# EAGLE board DP_AADK (EAGLE 5.07)
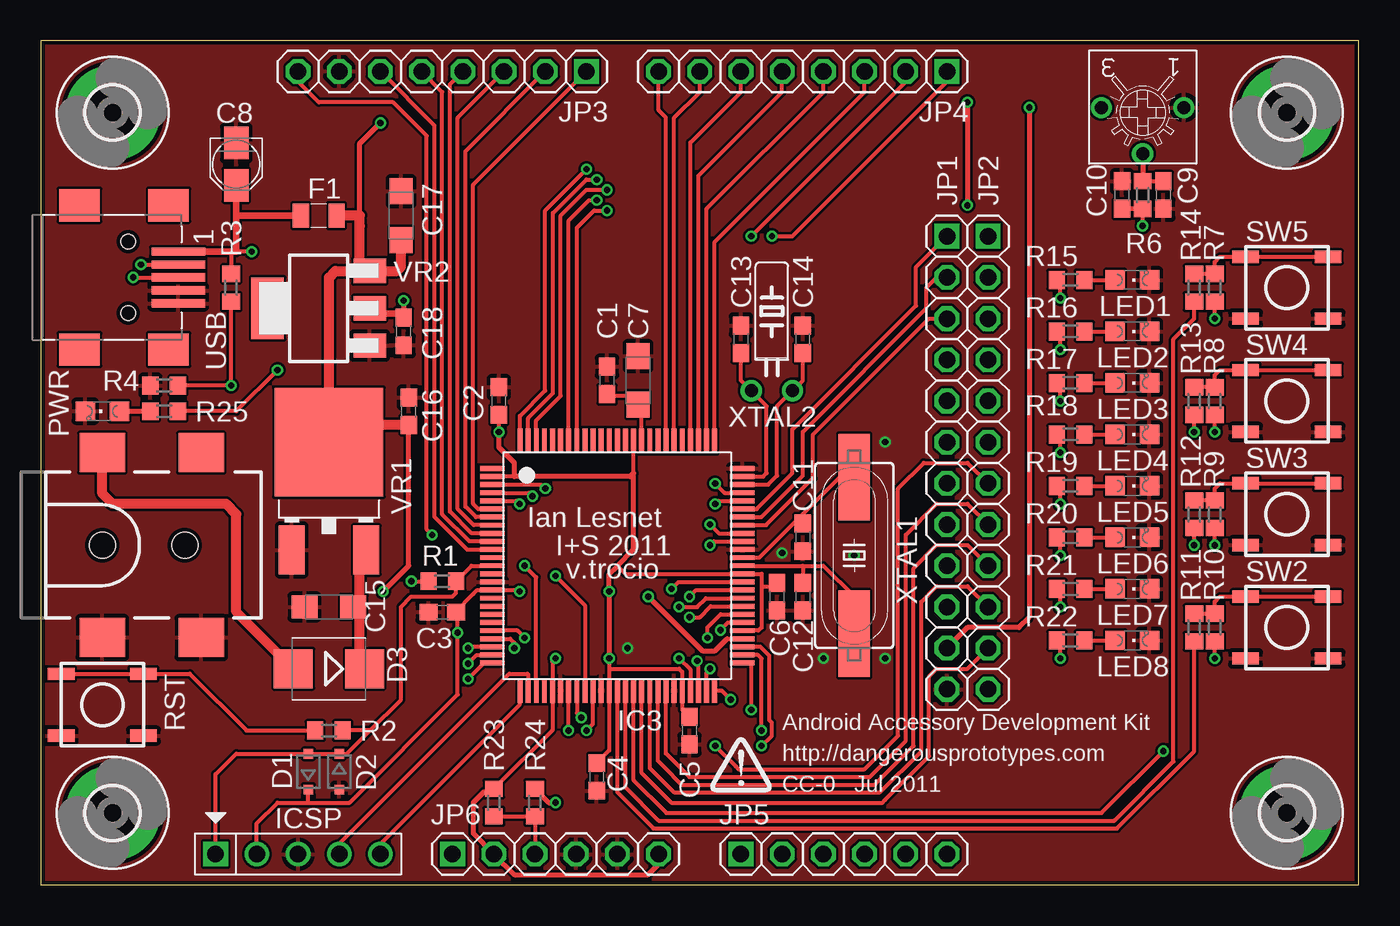
[diagram p0: board, top side]
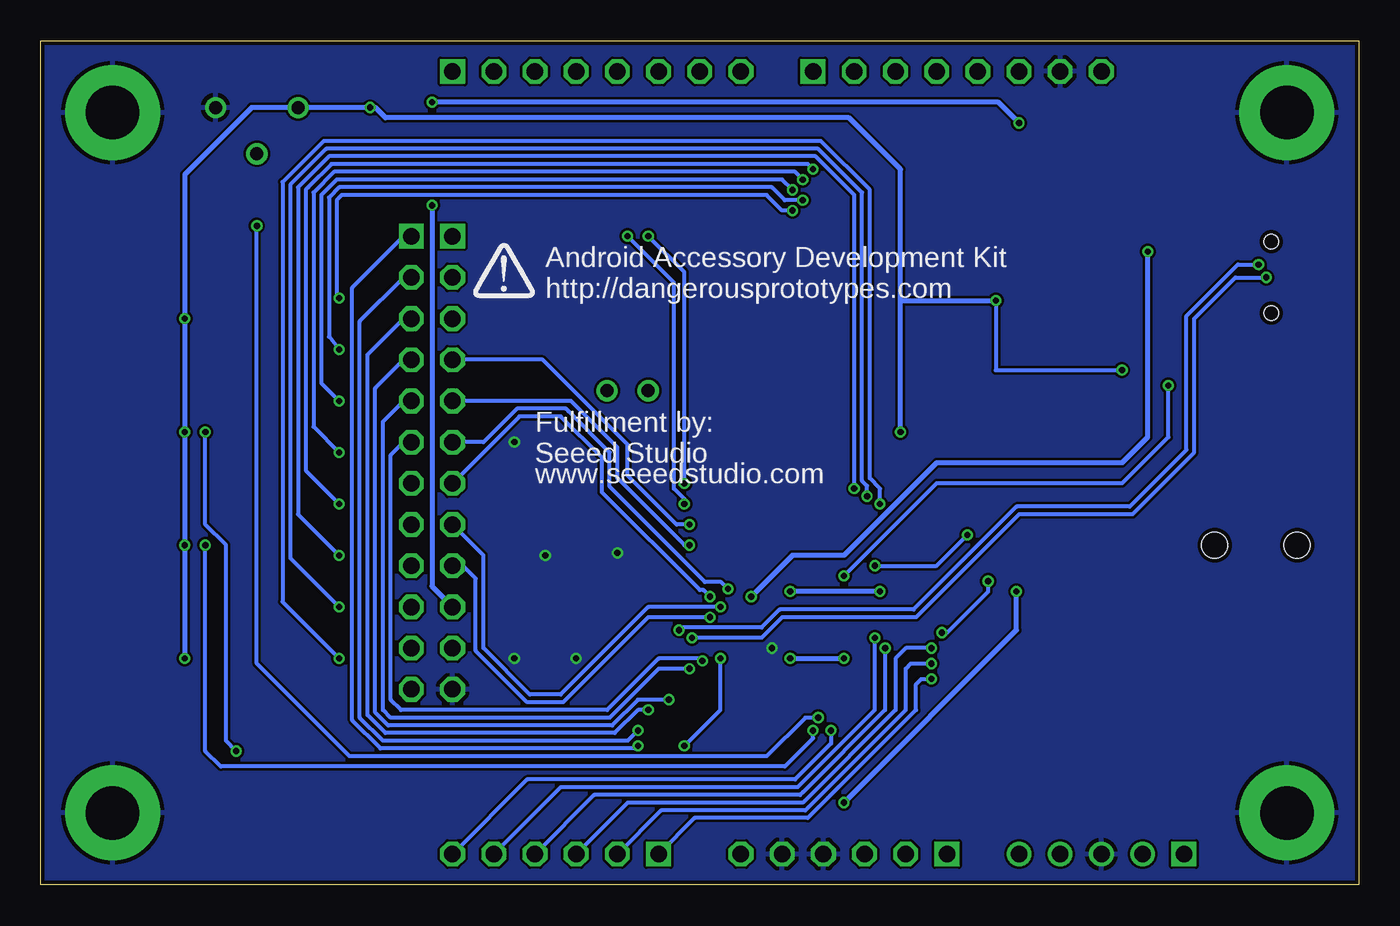
[diagram p1: board, bottom side, seen from below]

Size 81.28 x 52.07 mm. Coordinates in mm from the lower left corner, seen from the top.
Outline: 0,0 81.28,0 81.28,52.07 0,52.06 0,0
Copper layers (1*16): Top 0.035mm / dielectric 1.5mm / Bottom 0.035mm
Design rules "Fusion_eagle_rule_v1.1": minimum track width 6mil, minimum drill 12mil, track to track 6mil, track to pad 6mil, pad to pad 6mil, via to via 6mil, smd to smd 0mil, copper to edge 10mil, drill to drill 10mil, minimum pad ring 10mil, minimum via ring 6mil, stop-mask expansion 2mil, vias tented up to drill 100mil, thermal gap 10mil

## Footprints (pad centres in the part's own frame; a part is rotated, then mirrored left to right if it is on the bottom)
C603 = smd 1.1 x 1: 1 -0.85,0; 2 0.85,0
SMC_A = smd 1.6 x 1.4: + -1.5,0; - 1.5,0
CASE_A = smd 2 x 1.5: + 1.3,0; - -1.3,0
DO323 = smd 0.6 x 0.6: A 1.1,0; C -1.1,0
SMB = smd 2.4 x 2.4: A 2.2,0; C -2.2,0
0805_PTC = smd 1 x 1.5: 1 -1.1,0; 2 1.1,0
3,3-PAD = drill 3.3 pad 5.842 round: B3,3 0,0
TQFP100 = smd 0.3 x 1.5: P1 -6,-7.7; P2 -5.5,-7.7; P3 -5,-7.7; P4 -4.5,-7.7; P5 -4,-7.7; P6 -3.5,-7.7; P7 -3,-7.7; P8 -2.5,-7.7; P9 -2,-7.7; P10 -1.5,-7.7; P11 -1,-7.7; P12 -0.5,-7.7; P13 0,-7.7; P14 0.5,-7.7; P15 1,-7.7; P16 1.5,-7.7; P17 2,-7.7; P18 2.5,-7.7; P19 3,-7.7; P20 3.5,-7.7; P21 4,-7.7; P22 4.5,-7.7; P23 5,-7.7; P24 5.5,-7.7; P25 6,-7.7; P51 6,7.7; P52 5.5,7.7; P53 5,7.7; P54 4.5,7.7; P55 4,7.7; P56 3.5,7.7; P57 3,7.7; P58 2.5,7.7; P59 2,7.7; P60 1.5,7.7; P61 1,7.7; P62 0.5,7.7; P63 0,7.7; P64 -0.5,7.7; P65 -1,7.7; P66 -1.5,7.7; P67 -2,7.7; P68 -2.5,7.7; P69 -3,7.7; P70 -3.5,7.7; P71 -4,7.7; P72 -4.5,7.7; P73 -5,7.7; P74 -5.5,7.7; P75 -6,7.7 | smd 1.5 x 0.3: P26 7.7,-6; P27 7.7,-5.5; P28 7.7,-5; P29 7.7,-4.5; P30 7.7,-4; P31 7.7,-3.5; P32 7.7,-3; P33 7.7,-2.5; P34 7.7,-2; P35 7.7,-1.5; P36 7.7,-1; P37 7.7,-0.5; P38 7.7,0; P39 7.7,0.5; P40 7.7,1; P41 7.7,1.5; P42 7.7,2; P43 7.7,2.5; P44 7.7,3; P45 7.7,3.5; P46 7.7,4; P47 7.7,4.5; P48 7.7,5; P49 7.7,5.5; P50 7.7,6; P76 -7.7,6; P77 -7.7,5.5; P78 -7.7,5; P79 -7.7,4.5; P80 -7.7,4; P81 -7.7,3.5; P82 -7.7,3; P83 -7.7,2.5; P84 -7.7,2; P85 -7.7,1.5; P86 -7.7,1; P87 -7.7,0.5; P88 -7.7,0; P89 -7.7,-0.5; P90 -7.7,-1; P91 -7.7,-1.5; P92 -7.7,-2; P93 -7.7,-2.5; P94 -7.7,-3; P95 -7.7,-3.5; P96 -7.7,-4; P97 -7.7,-4.5; P98 -7.7,-5; P99 -7.7,-5.5; P100 -7.7,-6
HEADER_PRG_1X05_ICSP_B = drill 1.016 square: 1 -5.08,0 | drill 1.016 round: 2 -2.54,0; 3 0,0; 4 2.54,0; 5 5.08,0
1X12-S = drill 1.016 square: 1 -13.97,0 | drill 1.016 octagon: 2 -11.43,0; 3 -8.89,0; 4 -6.35,0; 5 -3.81,0; 6 -1.27,0; 7 1.27,0; 8 3.81,0; 9 6.35,0; 10 8.89,0; 11 11.43,0; 12 13.97,0
1X08-S = drill 1.016 square: 1 -8.89,0 | drill 1.016 octagon: 2 -6.35,0; 3 -3.81,0; 4 -1.27,0; 5 1.27,0; 6 3.81,0; 7 6.35,0; 8 8.89,0
1X06-S = drill 1.016 square: 1 -6.35,0 | drill 1.016 octagon: 2 -3.81,0; 3 -1.27,0; 4 1.27,0; 5 3.81,0; 6 6.35,0
LED-805 = smd 1.2 x 1.2: A 0,-1.05; C 0,1.05
R603 = smd 1 x 1.1: 1 -0.85,0; 2 0.85,0
TRIMMER_3362P = drill 0.8 round: 1 -2.54,-0.31; 2 0,2.54; 3 2.54,-0.31
TACT_SWITCH_SMALL = smd 1.651 x 0.762: 1 -2.54,1.905; 2 2.54,1.905; 3 -2.54,-1.905; 4 2.54,-1.905
POWER_JACK_SMD = smd 2.8 x 2.4: GND 0,-5.7; P$4 6.1,-5.7; VIN0 0,5.7; VIN1 6.1,5.7 | hole 1.6: 0,0; 5.08,0
CONN_USB_MINI-B = smd 2 x 2.5: BODY@1 -4.45,2.5; BODY@2 4.45,2.5; BODY@3 4.45,-3; BODY@4 -4.45,-3 | smd 0.5 x 3.3: D+ 0,3.1; D- -0.8,3.1; GND 1.6,3.1; ID 0.8,3.1; VUSB -1.6,3.1 | hole 0.9: -2.2,0; 2.2,0
DPAK = smd 1.6 x 3: 1 -2.3,-6.65; 3 2.3,-6.65 | smd 6.7 x 6.7: 2 0,0
SOT223 = smd 1.5 x 2: 1 -2.3,-3.15; 2 0,-3.15; 3 2.3,-3.15 | smd 3.8 x 2: 4 0,3.15
HC-49U = smd 5.334 x 1.93: 1 -4.826,0; 2 4.826,0
TC-26 = drill 0.8 round: P1 -1.27,-2.54; P2 1.27,-2.54

## Placement (x,y rotation side)
C1  0.1uF  [C603]  34.92,31.11 90 top
C2  0.1uF  [C603]  28.26,29.84 90 top
C3  0.1uF  [C603]  24.77,16.83 180 top
C4  0.1uF  [C603]  34.29,6.67 270 top
C5  0.1uF  [C603]  40.01,9.53 270 top
C6  0.1uF  [C603]  45.4,17.78 270 top
C7  10uF  [SMC_A]  36.83,31.11 90 top
C8  220uF  [CASE_A]  12.06,44.45 270 top
C9  1uF  [C603]  69.22,42.55 270 top
C10  0.01uF  [C603]  66.67,42.55 90 top
C11  33pF  [C603]  46.99,21.43 270 top
C12  33pF  [C603]  46.99,17.78 270 top
C13  12pF  [C603]  43.18,33.66 90 top
C14  12pF  [C603]  46.99,33.66 90 top
C15  10uF  [SMC_A]  17.78,17.14 180 top
C16  0.1uF  [C603]  22.7,29.21 90 top
C17  10uF  [SMC_A]  22.23,41.27 90 top
C18  0.1uF  [C603]  22.38,34.13 270 top
D1  [DO323]  16.51,6.99 90 top
D2  [DO323]  18.41,6.99 270 top
D3  ES2D  [SMB]  17.78,13.34 180 top
F1  0.75A  [0805_PTC]  17.14,41.27 0 top
H1  MOUNT-PAD-ROUND3.3  [3,3-PAD]  76.83,4.45 0 top
H2  MOUNT-PAD-ROUND3.3  [3,3-PAD]  4.45,47.62 0 top
H3  MOUNT-PAD-ROUND3.3  [3,3-PAD]  4.45,4.45 0 top
H4  MOUNT-PAD-ROUND3.3  [3,3-PAD]  76.83,47.62 0 top
IC3  [TQFP100]  35.56,19.68 270 top
ICSP  HEADER_PRG_PIC_ICSPB  [HEADER_PRG_1X05_ICSP_B]  15.88,1.91 0 top
JP1  [1X12-S]  55.88,26.04 270 top
JP2  [1X12-S]  58.42,26.04 270 top
JP3  [1X08-S]  24.77,50.16 180 top
JP4  [1X08-S]  46.99,50.16 180 top
JP5  [1X06-S]  49.53,1.91 0 top
JP6  [1X06-S]  31.75,1.91 0 top
LED1  [LED-805]  67.31,37.31 270 top
LED2  [LED-805]  67.31,34.13 270 top
LED3  [LED-805]  67.31,30.96 270 top
LED4  [LED-805]  67.31,27.78 270 top
LED5  [LED-805]  67.31,24.61 270 top
LED6  [LED-805]  67.31,21.43 270 top
LED7  [LED-805]  67.31,18.26 270 top
LED8  [LED-805]  67.31,15.08 270 top
PWR  [LED-805]  3.81,29.21 90 top
R1  10K  [R603]  24.77,18.73 180 top
R2  200R  [R603]  17.78,9.53 0 top
R3  10K  [R603]  11.75,36.83 90 top
R4  10K  [R603]  7.62,30.8 0 top
R5  10k  [TRIMMER_3362P]  67.94,47.62 180 top
R6  470R  [R603]  67.94,42.55 270 top
R7  10K  [R603]  72.39,36.83 270 top
R8  10K  [R603]  72.39,29.84 270 top
R9  10K  [R603]  72.39,22.86 270 top
R10  10K  [R603]  72.39,15.88 270 top
R11  470R  [R603]  71.12,15.88 90 top
R12  470R  [R603]  71.12,22.86 90 top
R13  470R  [R603]  71.12,29.84 90 top
R14  470R  [R603]  71.12,36.83 90 top
R15  470R  [R603]  63.5,37.31 0 top
R16  470R  [R603]  63.5,34.13 0 top
R17  470R  [R603]  63.5,30.96 0 top
R18  470R  [R603]  63.5,27.78 0 top
R19  470R  [R603]  63.5,24.61 0 top
R20  470R  [R603]  63.5,21.43 0 top
R21  470R  [R603]  63.5,18.26 0 top
R22  470R  [R603]  63.5,15.08 0 top
R23  0R  [R603]  27.94,5.08 270 top
R24  No Load  [R603]  30.48,5.08 270 top
R25  470R  [R603]  7.62,29.21 0 top
RST  [TACT_SWITCH_SMALL]  3.81,11.11 180 top
SW2  [TACT_SWITCH_SMALL]  76.83,15.88 0 top
SW3  [TACT_SWITCH_SMALL]  76.83,22.86 0 top
SW4  [TACT_SWITCH_SMALL]  76.83,29.84 0 top
SW5  [TACT_SWITCH_SMALL]  76.83,36.83 0 top
U$1  [DP-LOGO_TOP]  41.27,5.71 0 top
U$2  POWER_JACKSMD  [POWER_JACK_SMD]  3.81,20.95 0 top
U$3  DINA4_L  [DP_LOGO]  1.91,-6.35 0 top  (outside the outline)
U$4  [DP-LOGO-BOTTOM]  50.8,36.2 0 top
U$5  DINA4_L  [DP_LOGO]  1.91,-6.35 0 top  (outside the outline)
USB  CON-USB-MINI-BUSB1  [CONN_USB_MINI-B]  5.4,37.47 270 top
VR1  LD1117-5.0  [DPAK]  17.78,27.3 0 top
VR2  [SOT223]  17.14,35.56 90 top
XTAL1  8MHz  [HC-49U]  50.16,20.32 270 top
XTAL2  32.768Khz  [TC-26]  45.09,33.02 0 top

## Library data of the parts
C1-C18 D1 D2 F1 IC3 ICSP LED1-LED8 PWR R1-R25 RST SW2-SW5 U$3 USB VR1 VR2 XTAL1 XTAL2 = dp_devices
D3 = diode
H1-H4 = holes
JP1-JP6 = pinhead-2
U$1 U$4 = DP-logo
U$2 = SparkFun-3-2-07
U$5 = dp_devices; FF1: fulfillment by; FF2: Seeed Studio; FF3: www.seeedstudio.com; LICENSE: CC-0; PROJECT: Andriod Accessory Development kit; URL1: http://dangerousprototypes.com; URL2: DangerousPrototypes.com

## Nets
!MCLR: D1.A D2.C IC3.P13 ICSP.1 R1.1 R2.2
!MLCR: JP6.1
+3V3: C2.1 C3.1 C4.1 C5.1 C6.1 C18.1 D1.C IC3.P2 IC3.P16 IC3.P30 IC3.P37 IC3.P46 IC3.P55 IC3.P62 IC3.P86 ICSP.2 JP1.11 JP6.2 JP6.6 R1.2 R5.3 R7.2 R8.2 R9.2 R10.2 R23.1 R25.2 VR2.2
+5V: C16.1 C17.+ F1.2 JP1.10 R24.1 VR1.2 VR2.3
AN0: IC3.P25 JP5.1
AN1: IC3.P24 JP5.2
AN2: IC3.P23 JP5.3
AN3: IC3.P22 JP5.4
AN4: IC3.P21 JP5.5
AN8: IC3.P32 JP5.6
AREF: IC3.P28 JP3.8
BTN_1: IC3.P38 R11.1
BTN_2: IC3.P35 R12.1
BTN_3: IC3.P40 R13.1
BTN_4: IC3.P39 R14.1
CLK_1: C13.1 IC3.P74 XTAL2.P1
CLK_2: C14.1 IC3.P73 XTAL2.P2
D2: IC3.P76 JP4.3
D3: IC3.P77 JP4.4
D4: IC3.P78 JP4.5
D5: IC3.P79 JP4.6
D6: IC3.P81 JP4.7
D7: IC3.P82 JP4.8
D8: IC3.P6 JP3.1
D9: IC3.P7 JP3.2
D10: IC3.P8 JP3.3
D11: IC3.P9 JP3.4
D12: IC3.P10 JP3.5
D13: IC3.P11 JP3.6
GND: C1.2 C2.2 C3.2 C4.2 C5.2 C6.2 C7.- C8.- C9.2 C10.2 C11.2 C12.2 C13.2 C14.2 C15.- C16.2 C17.- C18.2 D2.A H1.B3,3 H2.B3,3 H3.B3,3 H4.B3,3 IC3.P15 IC3.P31 IC3.P36 IC3.P45 IC3.P65 IC3.P75 ICSP.3 JP1.12 JP3.7 JP6.4 JP6.5 LED1.C LED2.C LED3.C LED4.C LED5.C LED6.C LED7.C LED8.C PWR.C R4.1 R5.1 RST.1 RST.2 SW2.3 SW2.4 SW3.3 SW3.4 SW4.3 SW4.4 SW5.3 SW5.4 U$2.GND U$2.P$4 USB.GND USB.ID VR1.1 VR2.1
LED_1: IC3.P93 R15.1
LED_2: IC3.P94 R16.1
LED_3: IC3.P98 R17.1
LED_4: IC3.P99 R18.1
LED_5: IC3.P100 R19.1
LED_6: IC3.P3 R20.1
LED_7: IC3.P4 R21.1
LED_8: IC3.P5 R22.1
N$1: R2.1 RST.3 RST.4
N$2: C9.1 R5.2 R6.1
N$3: R10.1 R11.2 SW2.1 SW2.2
N$4: R9.1 R12.2 SW3.1 SW3.2
N$5: R8.1 R13.2 SW4.1 SW4.2
N$6: R7.1 R14.2 SW5.1 SW5.2
N$7: PWR.A R25.1
N$8: LED1.A R15.2
N$9: LED2.A R16.2
N$10: LED3.A R17.2
N$11: LED4.A R18.2
N$12: LED5.A R19.2
N$13: LED6.A R20.2
N$14: LED7.A R21.2
N$15: LED8.A R22.2
N$16: JP6.3 R23.2 R24.2
N$17: D3.A U$2.VIN0
N$18: C15.+ D3.C VR1.3
OSC_1: C11.1 IC3.P64 XTAL1.1
OSC_2: C12.1 IC3.P63 XTAL1.2
OVER_CURRENT: IC3.P34 R3.1 R4.2
PGC: IC3.P26 ICSP.5
PGD: IC3.P27 ICSP.4
RA2: IC3.P58 JP1.9
RA3: IC3.P59 JP1.8
RA4: IC3.P60 JP1.7
RA5: IC3.P61 JP1.6
RA14: IC3.P66 JP1.5
RA15: IC3.P67 JP1.4
RB12: IC3.P41 JP2.11
RB13: IC3.P42 JP2.10
RB14: IC3.P43 JP2.9
RB15: IC3.P44 JP2.8
RD8: IC3.P68 JP1.3
RD9: IC3.P69 JP1.2
RD10: IC3.P70 JP1.1
RD14: IC3.P47 JP2.7
RD15: IC3.P48 JP2.6
RF2: IC3.P52 JP2.2
RF3: IC3.P51 JP2.3
RF4: IC3.P49 JP2.5
RF5: IC3.P50 JP2.4
RF8: IC3.P53 JP2.1
RXD: IC3.P71 JP4.1
TRIM: C10.1 IC3.P33 R6.2
TXD: IC3.P72 JP4.2
USB_D+: IC3.P57 USB.D+
USB_D-: IC3.P56 USB.D-
VBUS_OUT: C8.+ F1.1 IC3.P54 R3.2 USB.VUSB
VDDCORE: C1.1 C7.+ IC3.P85

## Tracks (layer width: path | path; a pad name or v marks a point on that pad's centre or on a via)
!MCLR
  Top 0.254: IC3.P13 26.57,19.68 R1.1 25.61,18 25.4,17.78 22.86,17.78 22.23,17.14 22.23,11.43 20.32,9.53 | ICSP.1 10.79,6.83 12.06,8.1 16.5,8.1 D1.A D2.C 18.88,8.09 20.32,9.53 | 20.32,9.53 R2.2
+3V3  (via drill 0.38)
  Top 0.254: C18.1 22.49,35.08 22.38,35.08 v22.38,36.04 | ICSP.2 13.34,3.81 14.61,5.08 16.51,5.08 | 36.56,25.4 IC3.P86 | v35.06,13.97 35.06,13.34 | 35.06,13.34 IC3.P37 35.06,8.29 C4.1 | 35.56,19.68 36.06,19.18 IC3.P62 44.45,19.18 44.45,18.41 | v72.39,13.97 R10.2 | v72.39,20.95 R9.2 | v72.39,27.94 R8.2 | v72.39,34.92 R7.2 | IC3.P55 44.26,15.69 44.45,15.88 44.45,18.41 | C6.1 45.3,18.63 45.09,18.41 44.45,18.41 | 29.21,25.18 IC3.P2 | v28.26,27.94 C2.1 | C5.1 39.56,10.82 IC3.P46 39.56,13.14 39.37,13.34 35.06,13.34 | 26.67,17.94 26.92,18.18 IC3.P16 29.44,18.18 v29.53,18.1 | 26.67,17.94 | 26.67,17.94 25.61,16.88 C3.1 25.72,16.73 v25.72,15.56 25.72,11.75 19.05,5.08 16.51,5.08 | v22.86,18.73 R1.2 | R25.2 12.06,29.21 v14.61,31.75 | v31.75,13.97 31.56,13.78 IC3.P30 31.56,9.55 R23.1 | 16.51,5.08 D1.C
  Top 0.305: v35.06,13.97 v35.06,18.1 35.06,19.18 35.56,19.68 36.56,20.68 36.56,25.4 36.34,25.18 29.21,25.18 29.21,26.04 28.26,26.99 v28.26,27.94 | R23.1 27.94,5.71 27.3,5.71 26.67,5.08 26.67,3.17 JP6.2 29.21,0.64 37.47,0.64 38.1,1.27 JP6.6 | v22.38,36.04 C18.1 | JP1.11 57.15,15.88 60.33,15.88 60.96,16.51 v60.96,47.94
  Top 0.406: VR2.2 20.3,35.27 20.32,35.24 22.38,35.24 22.38,35.08 22.28,35.08 C18.1
  Bottom 0.254: v22.86,18.73 22.86,18.1 25.4,15.56 v25.72,15.56 | v14.61,31.75 22.38,31.75 v22.38,36.04
  Bottom 0.305: v72.39,13.97 v72.39,20.95 v72.39,27.94 v72.39,34.92 72.39,43.81 68.27,47.94 R5.3 60.63,47.94 | v35.06,13.97 v31.75,13.97 | v29.53,18.1 v35.06,18.1 | 28.26,36.04 v22.38,36.04 | v28.26,27.94 28.26,36.04 | 28.26,36.04 28.26,44.13 31.43,47.31 60.01,47.31 60.63,47.94 | 60.63,47.94 v60.96,47.94
+5V  (via drill 0.38)
  Top 0.305: v20.95,46.99 19.68,45.72 19.68,40.64 | v57.15,48.26 v57.15,41.91 | C16.1 22.7,19.68 v21.11,18.1 | v31.75,5.08 31.33,5.08 R24.1
  Top 0.61: C16.1 17.57,28.36 17.46,28.26 17.46,27.94 17.36,27.73 VR1.2 17.78,37.47 18.18,37.86 VR2.3 | VR2.3 19.93,37.86 19.68,38.1 19.68,40.64 19.68,41.27 F1.2 | VR2.3 21.98,37.86 22.23,38.1 C17.+
  Bottom 0.305: JP1.10 57.15,18.41 v57.15,41.91 | v20.95,46.99 22.23,48.26 v57.15,48.26 | v21.11,18.1 21.11,15.72 v31.75,5.08
AN0  (via drill 0.38)
  Top 0.254: IC3.P25 27.34,13.69 v26.35,12.7
  Bottom 0.254: v26.35,12.7 26.99,12.7 27.3,12.38 27.3,10.79 33.97,4.13 40.96,4.13 JP5.1
AN1  (via drill 0.38)
  Top 0.254: IC3.P24 26.89,14.19 v26.35,13.65
  Bottom 0.254: v26.35,13.65 27.62,13.65 27.94,13.34 27.94,10.79 33.66,5.08 | 33.66,5.08 | 33.66,5.08 34.13,4.6 43.02,4.6 JP5.2
AN2  (via drill 0.38)
  Top 0.254: IC3.P23 26.43,14.69 v26.35,14.61
  Bottom 0.254: v26.35,14.61 27.94,14.61 28.57,13.97 28.57,10.79 34.29,5.08 45.09,5.08 JP5.3
AN3  (via drill 0.38)
  Top 0.254: IC3.P22 28.95,15.19 29.21,14.92 v29.21,14.61
  Bottom 0.254: v29.21,14.61 29.21,10.79 34.29,5.71 | 34.29,5.71 | 34.29,5.71 34.45,5.56 47.15,5.56 JP5.4
AN4  (via drill 0.38)
  Top 0.254: IC3.P21 29.4,15.69 v29.84,15.24
  Bottom 0.254: v29.84,15.24 29.84,10.79 34.61,6.03 49.21,6.03 JP5.5
AN8  (via drill 0.38)
  Top 0.254: IC3.P32 32.56,9.54 v32.54,9.53
  Bottom 0.254: JP5.6 51.28,6.51 34.77,6.51 32.54,8.73 v32.54,9.53
AREF  (via drill 0.38)
  Top 0.254: JP3.8 15.88,49.53 17.14,48.26 21.75,48.26 23.81,46.2 23.81,21.91 v24.13,21.59 | IC3.P28 30.56,18.97 v29.84,19.68
  Bottom 0.254: v29.84,19.68 26.04,19.68 v24.13,21.59
BTN_1
  Top 0.254: R11.1 71.12,8.26 66.36,3.49 37.78,3.49 35.56,5.71 IC3.P38
BTN_2  (via drill 0.38)
  Top 0.254: v71.12,20.95 R12.1 | IC3.P35 34.06,9.93 v33.66,9.53
  Bottom 0.254: v33.66,9.53 33.66,9.05 35.4,7.3 70.17,7.3 71.12,8.26 v71.12,20.95
BTN_3  (via drill 0.38)
  Top 0.254: v71.12,27.94 R13.1 | v69.22,8.26 65.41,4.45 38.58,4.45 36.56,6.46 IC3.P40
  Bottom 0.254: v71.12,27.94 71.12,22.23 69.85,20.95 69.85,8.89 v69.22,8.26
BTN_4
  Top 0.254: R14.1 71.12,34.92 69.85,33.66 69.85,7.62 66.2,3.97 38.1,3.97 36.06,6.01 IC3.P39
CLK_1
  Top 0.254: IC3.P74 44.55,25.18 44.77,25.4 44.77,29.53 XTAL2.P1 43.18,31.11 C13.1
CLK_2
  Top 0.254: IC3.P73 44.85,24.68 45.4,25.24 45.4,29.53 XTAL2.P2 46.99,31.11 C14.1
D2
  Top 0.254: IC3.P76 41.56,39.66 50.8,48.9 JP4.3
D3
  Top 0.254: IC3.P77 41.06,41.7 48.26,48.9 JP4.4
D4
  Top 0.254: IC3.P78 40.56,43.73 45.72,48.9 JP4.5
D5
  Top 0.254: IC3.P79 40.06,45.77 43.18,48.9 JP4.6
D6
  Top 0.254: IC3.P81 39.06,47.31 40.64,48.9 JP4.7
D7
  Top 0.254: IC3.P82 38.56,47.32 38.1,47.78 JP4.8
D8
  Top 0.254: IC3.P6 26.98,23.18 26.67,23.5 26.67,43.18 JP3.1
D9
  Top 0.254: IC3.P7 26.84,22.68 26.19,23.34 26.19,45.24 JP3.2
D10
  Top 0.254: IC3.P8 26.71,22.18 25.72,23.18 25.72,47.31 JP3.3
D11
  Top 0.254: IC3.P9 26.57,21.68 25.24,23.02 25.24,49.37 JP3.4
D12
  Top 0.254: IC3.P10 26.44,21.18 24.77,22.86 24.77,48.9 JP3.5
D13
  Top 0.254: IC3.P11 26.3,20.68 24.29,22.7 24.29,46.83 JP3.6
GND  (via drill 0.38)
  other vias: 45.72,20.48 50.16,20.32 48.26,13.97 52.07,13.97 52.07,27.3 36.2,14.61
  pour Bottom: 0,52.07 81.28,52.07 81.28,-0.64 0,-0.64
  pour Top: 0,52.07 81.28,52.07 81.28,-0.64 0,-0.64
LED_1  (via drill 0.38)
  Top 0.254: v62.87,36.2 62.87,37.31 62.76,37.2 R15.1 | IC3.P93 33.06,40.52 34.13,41.59 v34.92,41.59
  Bottom 0.254: v62.87,36.2 63.02,36.35 63.02,42.23 62.71,42.55 36.51,42.55 35.56,41.59 v34.92,41.59
LED_2  (via drill 0.38)
  Top 0.254: R16.1 62.55,33.87 62.76,34.03 62.87,34.13 v62.87,33.02 | IC3.P94 32.56,40.97 33.81,42.23 v34.29,42.23
  Bottom 0.254: v62.87,33.02 63.5,33.81 63.5,42.39 62.87,43.02 36.2,43.02 35.4,42.23 v34.29,42.23
LED_3  (via drill 0.38)
  Top 0.254: IC3.P98 30.56,28.66 32.07,30.16 32.07,41.27 33.66,42.86 v34.92,42.86 | R17.1 62.55,30.85 62.76,30.85 62.87,30.96 v62.87,29.84
  Bottom 0.254: v34.92,42.86 35.56,43.5 63.02,43.5 63.98,42.55 63.98,30.96 v62.87,29.84
LED_4  (via drill 0.38)
  Top 0.254: IC3.P99 30.06,28.79 31.59,30.32 31.59,41.43 33.66,43.5 v34.29,43.5 | R18.1 62.55,27.68 62.76,27.68 62.87,27.78 v62.87,26.67
  Bottom 0.254: v34.29,43.5 34.77,43.97 63.18,43.97 64.45,42.7 64.45,28.26 v62.87,26.67
LED_5  (via drill 0.38)
  Top 0.254: IC3.P100 29.56,28.93 31.11,30.48 31.11,41.59 v33.66,44.13 | R19.1 62.55,24.5 62.76,24.5 62.87,24.61 v62.87,23.5
  Bottom 0.254: 64.77,43.02 63.34,44.45 33.97,44.45 v33.66,44.13 | 64.77,43.02 | 64.77,43.02 64.93,42.86 64.93,25.56 v62.87,23.5
LED_6  (via drill 0.38)
  Top 0.254: IC3.P3 30.88,24.68 v31.11,24.45 | R20.1 62.55,21.33 62.76,21.33 62.87,21.43 v62.87,20.32
  Bottom 0.254: v31.11,24.45 31.11,42.55 33.5,44.93 63.5,44.93 65.25,43.18 | 65.25,43.18 | 65.25,43.18 65.41,43.02 65.41,22.86 v62.87,20.32
LED_7  (via drill 0.38)
  Top 0.254: IC3.P4 30.11,24.18 v30.32,23.97 | R21.1 62.55,18.15 62.76,18.15 62.87,18.26 v62.87,17.14
  Bottom 0.254: v30.32,23.97 30.32,24.61 30.64,24.92 30.64,42.7 33.34,45.4 63.66,45.4 65.88,43.18 65.88,20.16 v62.87,17.14
LED_8  (via drill 0.38)
  Top 0.254: IC3.P5 29.34,23.68 v29.53,23.5 | R22.1 62.55,14.98 62.76,14.98 62.87,15.08 v62.87,13.97
  Bottom 0.254: v29.53,23.5 29.53,24.45 30.16,25.08 30.16,42.86 33.18,45.88 63.82,45.88 66.2,43.5 | 66.2,43.5 | 66.2,43.5 66.36,43.34 66.36,17.46 v62.87,13.97
N$1
  Top 0.254: RST.4 RST.3 9.21,13.02 12.7,9.53 R2.1
N$2
  Top 0.254: R6.1 C9.1
  Top 0.305: R5.2 R6.1
N$3
  Top 0.254: SW2.2 SW2.1 72.71,17.78 72.39,17.46 R10.1 R11.2
N$4
  Top 0.254: SW3.2 SW3.1 72.71,24.77 72.39,24.45 R9.1 R12.2
N$5
  Top 0.254: SW4.2 SW4.1 72.71,31.75 72.39,31.43 R8.1 R13.2
N$6
  Top 0.254: SW5.2 SW5.1 72.71,38.73 72.39,38.42 R7.1 R14.2
N$7
  Top 0.305: PWR.A R25.1
N$8
  Top 0.254: R15.2 LED1.A
N$9
  Top 0.254: R16.2 LED2.A
N$10
  Top 0.254: R17.2 LED3.A
N$11
  Top 0.254: R18.2 LED4.A
N$12
  Top 0.254: R19.2 LED5.A
N$13
  Top 0.254: R20.2 LED6.A
N$14
  Top 0.254: R21.2 LED7.A
N$15
  Top 0.254: R22.2 LED8.A
N$16
  Top 0.254: JP6.3 R24.2 R23.2
N$17
  Top 0.61: U$2.VIN0 3.81,24.13 4.45,23.5 11.43,23.5 12.06,22.86 12.06,16.85 D3.A
N$18
  Top 0.61: D3.C 19.98,13.68 19.68,13.97 19.68,16.74 C15.+ 19.68,17.55 19.68,20.32 20.02,20.66 VR1.3
OSC_1
  Top 0.254: IC3.P64 44.31,20.18 46.67,22.54 | 46.67,22.54 49.85,25.72 50.16,26.04 | C11.1 46.77,22.44 46.67,22.54
  Top 0.406: XTAL1.1 49.85,25.15 49.85,25.72
OSC_2
  Top 0.254: IC3.P63 46.99,19.68 | 46.99,19.68 48.26,19.68 50.16,17.78 XTAL1.2 | 46.99,19.68 C12.1
OVER_CURRENT  (via drill 0.38)
  Top 0.254: R4.2 v11.75,30.8 R3.1 | IC3.P34 33.56,17.24 v31.75,19.05
  Bottom 0.254: v11.75,30.8 11.75,27.62 14.61,24.77 26.04,24.77 v31.75,19.05
PGC
  Top 0.254: ICSP.5 20.95,2.54 29.56,11.14 IC3.P26
PGD
  Top 0.254: IC3.P27 30.06,12.96 30,13.02 28.89,13.02 18.41,2.54 ICSP.4
RA2  (via drill 0.38)
  Top 0.254: IC3.P58 41.31,17.18 40.64,16.51 v40.01,16.51
  Bottom 0.254: JP1.9 55.24,19.68 54.45,18.89 54.45,14.45 51.28,11.27 49.05,11.27 43.81,16.51 v40.01,16.51
RA3  (via drill 0.38)
  Top 0.254: IC3.P59 41.02,17.68 40.48,17.14 v39.37,17.14
  Bottom 0.254: JP1.8 53.98,20.32 53.98,14.61 51.12,11.75 49.21,11.75 43.81,17.14 v39.37,17.14
RA4  (via drill 0.38)
  Top 0.254: IC3.P60 40.41,18.18 v40.01,17.78
  Bottom 0.254: JP1.7 51.75,28.89 49.21,28.89 46.67,26.35 46.67,24.22 40.64,18.18 40.41,18.18 v40.01,17.78
RA5  (via drill 0.38)
  Top 0.254: IC3.P61 39.32,18.68 v38.89,18.26
  Bottom 0.254: 48.74,29.21 46.2,26.67 46.2,24.56 40.32,18.68 39.32,18.68 v38.89,18.26 | 48.74,29.21 | 48.74,29.21 48.9,29.37 51.91,29.37 53.98,27.3 JP1.6
RA14  (via drill 0.38)
  Top 0.254: IC3.P66 41.51,21.18 v41.27,20.95
  Bottom 0.254: v41.27,20.95 41.59,20.95 45.72,25.08 45.72,26.99 48.58,29.84 JP1.5
RA15  (via drill 0.38)
  Top 0.254: IC3.P67 41.81,21.68 v41.27,22.23
  Bottom 0.254: v41.27,22.23 42.07,22.23 45.09,25.24 45.09,27.15 50.32,32.38 JP1.4
RB12
  Top 0.254: 52.07,5.24 54.77,7.94 54.77,12.86 55.24,13.34 57.15,13.34 JP2.11 | 52.07,5.24 | 52.07,5.24 51.91,5.08 38.89,5.08 37.06,6.91 IC3.P41
RB13
  Top 0.254: JP2.10 57.15,18.41 55.24,18.41 54.29,17.46 54.29,8.26 51.75,5.71 39.05,5.71 37.56,7.21 IC3.P42
RB14
  Top 0.254: 51.59,6.35 53.82,8.57 53.82,19.53 55.24,20.95 57.15,20.95 JP2.9 | 51.59,6.35 | 51.59,6.35 51.44,6.19 39.53,6.19 38.42,7.3 38.06,7.66 IC3.P43
RB15
  Top 0.254: 38.89,7.78 | 38.89,7.78 40.01,6.67 51.12,6.67 53.34,8.89 53.34,21.59 55.24,23.5 57.15,23.5 JP2.8 | IC3.P44 38.56,8.11 38.89,7.78
RD8
  Top 0.254: IC3.P68 44.73,22.18 47.62,25.08 47.62,27.78 54.77,34.92 JP1.3
RD9
  Top 0.254: IC3.P69 44.43,22.68 46.99,25.24 46.99,27.94 54.61,35.56 54.61,36.83 55.24,37.47 JP1.2
RD10
  Top 0.254: IC3.P70 44.14,23.18 46.35,25.4 46.35,28.1 53.98,35.72 53.98,38.1 JP1.1
RD14  (via drill 0.38)
  Top 0.254: IC3.P47 40.06,13.28 v39.37,13.97 | v41.59,8.57 42.86,7.3 43.02,7.14 50.8,7.14 52.86,9.21 52.86,24.45 54.45,26.04 57.15,26.04 JP2.7
  Bottom 0.254: v39.37,13.97 39.37,10.79 v41.59,8.57
RD15  (via drill 0.38)
  Top 0.254: IC3.P48 40.56,13.73 v40.48,13.81
  Bottom 0.254: JP2.6 58.9,27.3 59.69,26.51 59.69,11.43 59.05,10.79 46.35,10.79 43.18,13.97 40.64,13.97 v40.48,13.81
RF2  (via drill 0.38)
  Top 0.254: IC3.P52 44.23,14.19 44.45,13.97 v44.45,9.53
  Bottom 0.254: JP2.2 58.9,37.47 61.59,34.77 61.59,10.32 60.17,8.89 45.09,8.89 v44.45,9.53
RF3  (via drill 0.38)
  Top 0.254: 43.47,13.69 IC3.P51 43.29,13.65 43.81,13.65 v43.81,10.79
  Bottom 0.254: JP2.3 58.9,34.92 61.12,32.7 61.12,10.48 60.01,9.37 45.88,9.37 44.45,10.79 v43.81,10.79
RF4  (via drill 0.38)
  Top 0.254: IC3.P49 41.06,13.12 v41.27,13.34
  Bottom 0.254: JP2.5 58.9,29.84 60.17,28.57 60.17,10.79 59.69,10.32 46.2,10.32 43.18,13.34 v41.27,13.34
RF5  (via drill 0.38)
  Top 0.254: IC3.P50 41.99,11.98 v42.55,11.43
  Bottom 0.254: JP2.4 58.9,32.38 60.64,30.64 60.64,10.64 59.85,9.84 46.04,9.84 44.45,11.43 v42.55,11.43
RF8  (via drill 0.38)
  Top 0.254: IC3.P53 44.37,14.69 44.93,14.13 44.93,10.16 45.09,10 45.09,9.21 v44.45,8.57
  Bottom 0.254: JP2.1 58.9,40.01 62.07,36.83 62.07,10.16 60.33,8.41 44.61,8.41 v44.45,8.57
RXD  (via drill 0.38)
  Top 0.254: IC3.P71 41.78,23.68 v41.59,23.5 | JP4.1 55.88,49.53 46.35,40.01 v45.09,40.01
  Bottom 0.254: v41.59,23.5 41.59,23.81 42.23,24.45 42.23,37.15 v45.09,40.01
TRIM  (via drill 0.38)
  Top 0.254: R6.2 C10.1 67.73,41.7 67.94,41.91 v67.94,40.64 | IC3.P33 33.06,10.6 v33.34,10.32
  Bottom 0.254: v67.94,40.64 67.94,13.65 62.23,7.94 36.51,7.94 34.13,10.32 v33.34,10.32
TXD  (via drill 0.38)
  Top 0.254: IC3.P72 42.17,24.18 v41.59,24.77 | v43.81,40.01 53.34,49.53 JP4.2
  Bottom 0.254: v41.59,24.77 41.59,37.78 v43.81,40.01
USB_D+  (via drill 0.38)
  Top 0.254: v5.71,37.47 USB.D+ | IC3.P57 41.93,16.68 41.12,15.88 v41.12,15.24
  Bottom 0.254: v5.71,37.47 7.62,37.47 10.16,34.92 10.16,26.67 13.97,22.86 20.95,22.86 27.3,16.51 35.56,16.51 36.83,15.24 v41.12,15.24
USB_D-  (via drill 0.38)
  Top 0.254: IC3.P56 42.38,16.18 v41.91,15.72 | USB.D- v6.18,38.27 v6.19,38.26
  Bottom 0.254: v6.19,38.26 7.46,38.26 10.64,35.08 10.64,26.83 13.97,23.5 | 13.97,23.5 | 13.97,23.5 14.13,23.34 21.11,23.34 21.91,22.54 27.46,16.99 35.72,16.99 36.83,15.88 41.75,15.88 v41.91,15.72
VBUS_OUT  (via drill 0.38)
  Top 0.254: 11.75,39.05 11.75,39.06 | 42.33,15.19 IC3.P54 | 11.75,39.05 R3.2 | v13.02,39.05 11.75,39.05
  Top 0.305: 42.33,15.19 41.59,14.45 40.8,14.45 v37.47,17.78
  Top 0.406: 12.06,41.27 C8.+ | USB.VUSB 11.75,39.06 12.06,39.06 12.06,41.27 | 12.06,41.27 F1.1
  Bottom 0.305: v13.02,39.05 13.02,27.62 14.61,26.04 26.04,26.04 31.75,20.32 34.92,20.32 v37.47,17.78
VDDCORE
  Top 0.254: IC3.P85 37.06,29.39 C7.+ 36.83,30.16 35.03,30.16 C1.1

## Text on the board
tPlace: Ian Lesnet | I+S 2011 | v.trocio | Android Accessory Development Kit | http://dangerousprototypes.com | CC-0 | Jul 2011
bNames: Android Accessory Development Kit | http://dangerousprototypes.com | Fulfillment by: | Seeed Studio | www.seeedstudio.com